# Altium PCB PCB1.PcbDoc (part 1 of 2)
Units mil, origin at the board's own origin, x right, y up, seen from the top; angles counter-clockwise.
Board outline 1707.5 x 1259.84 mil, 4 copper layers (Top Layer, GND, Sign, Bottom Layer), stack 41.556 mil thick; 63 components, 57 nets, 288 pads, 252 vias.
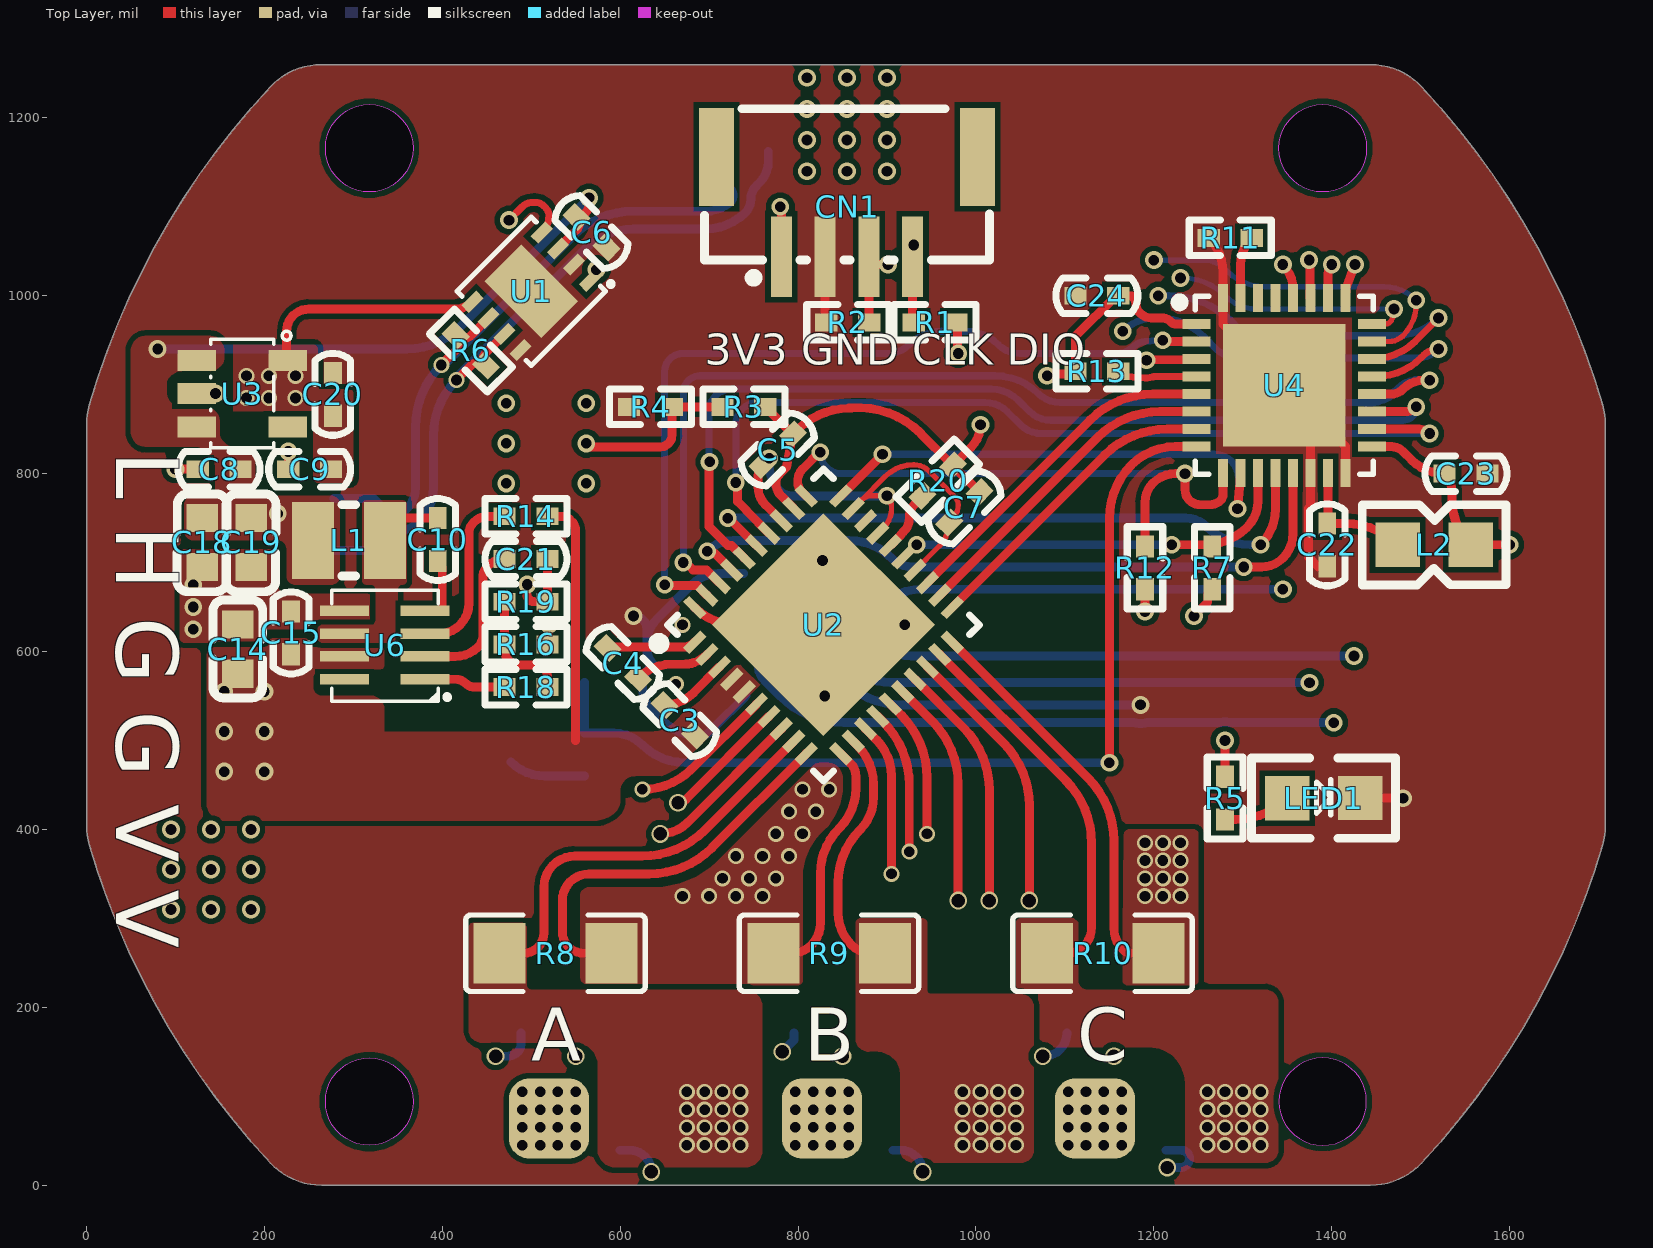
[diagram p0: Top Layer view]
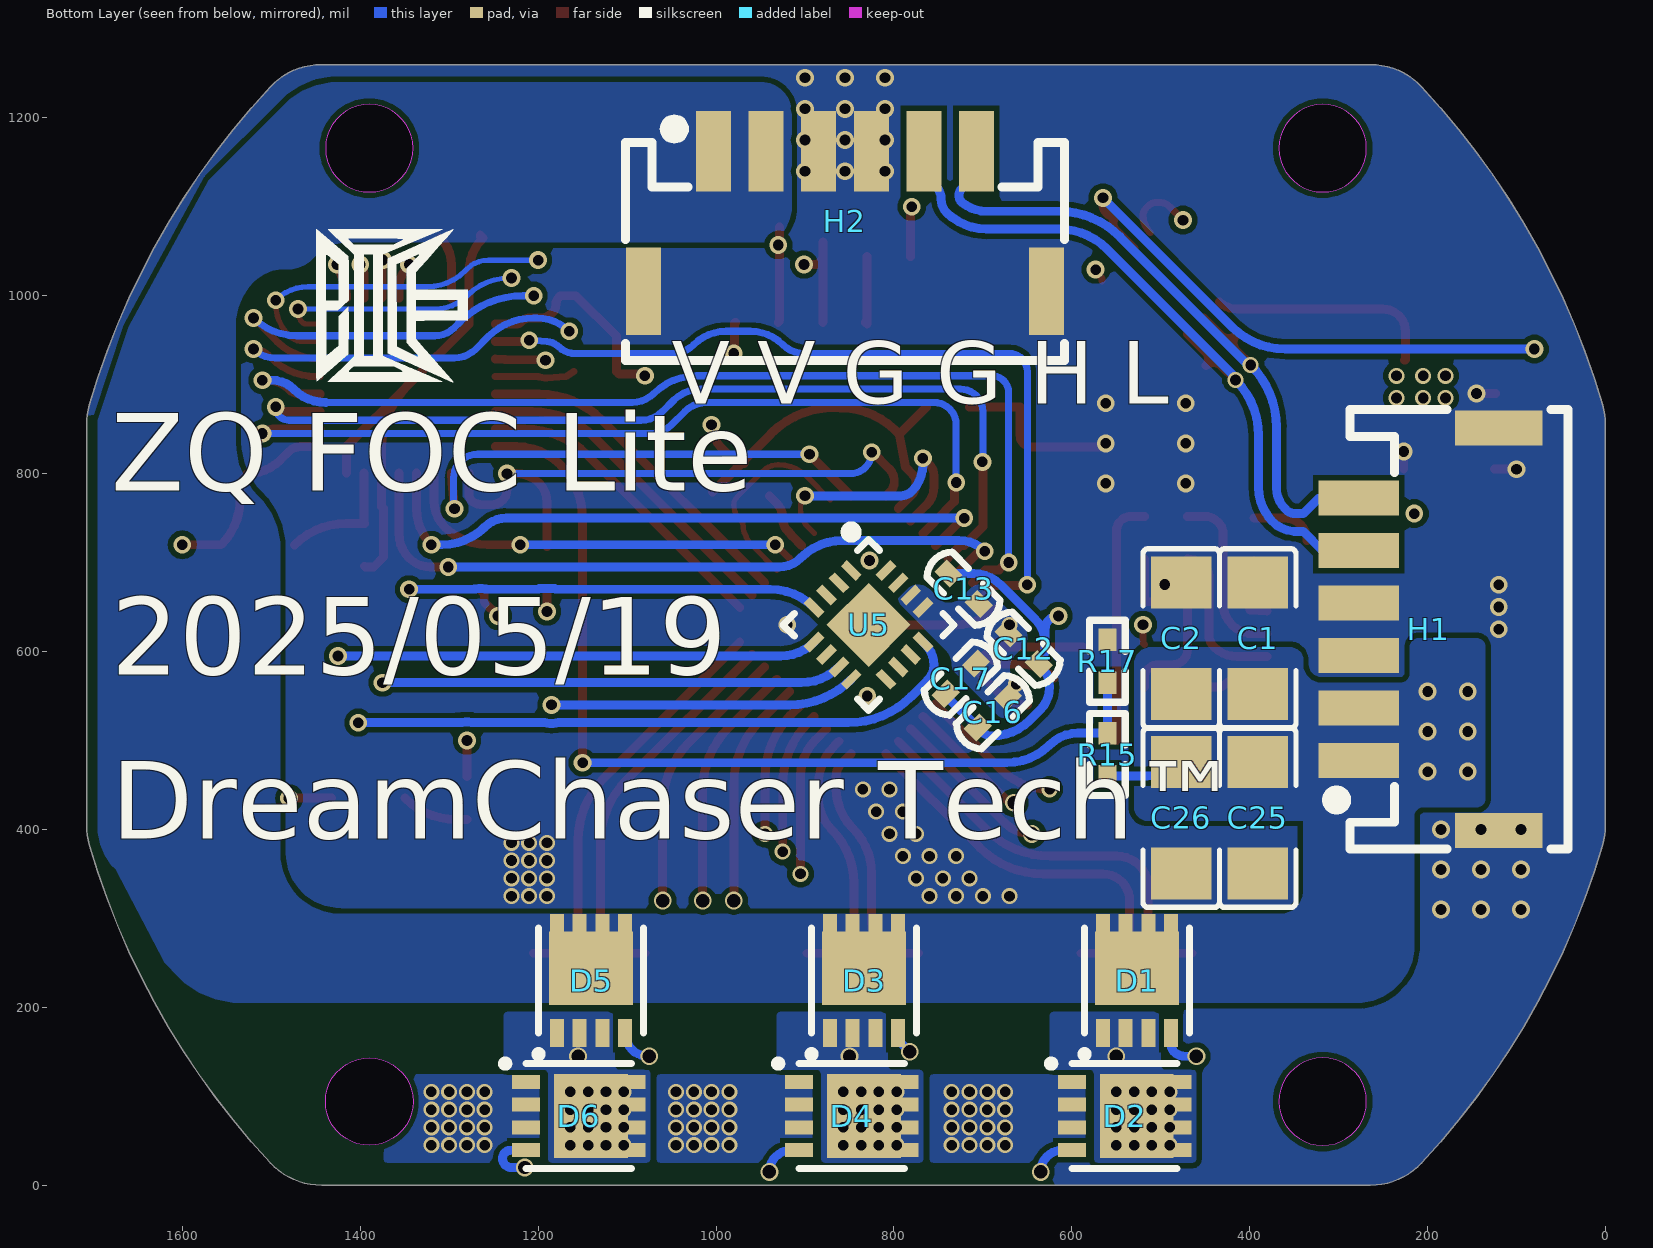
[diagram p1: Bottom Layer view, seen from below]
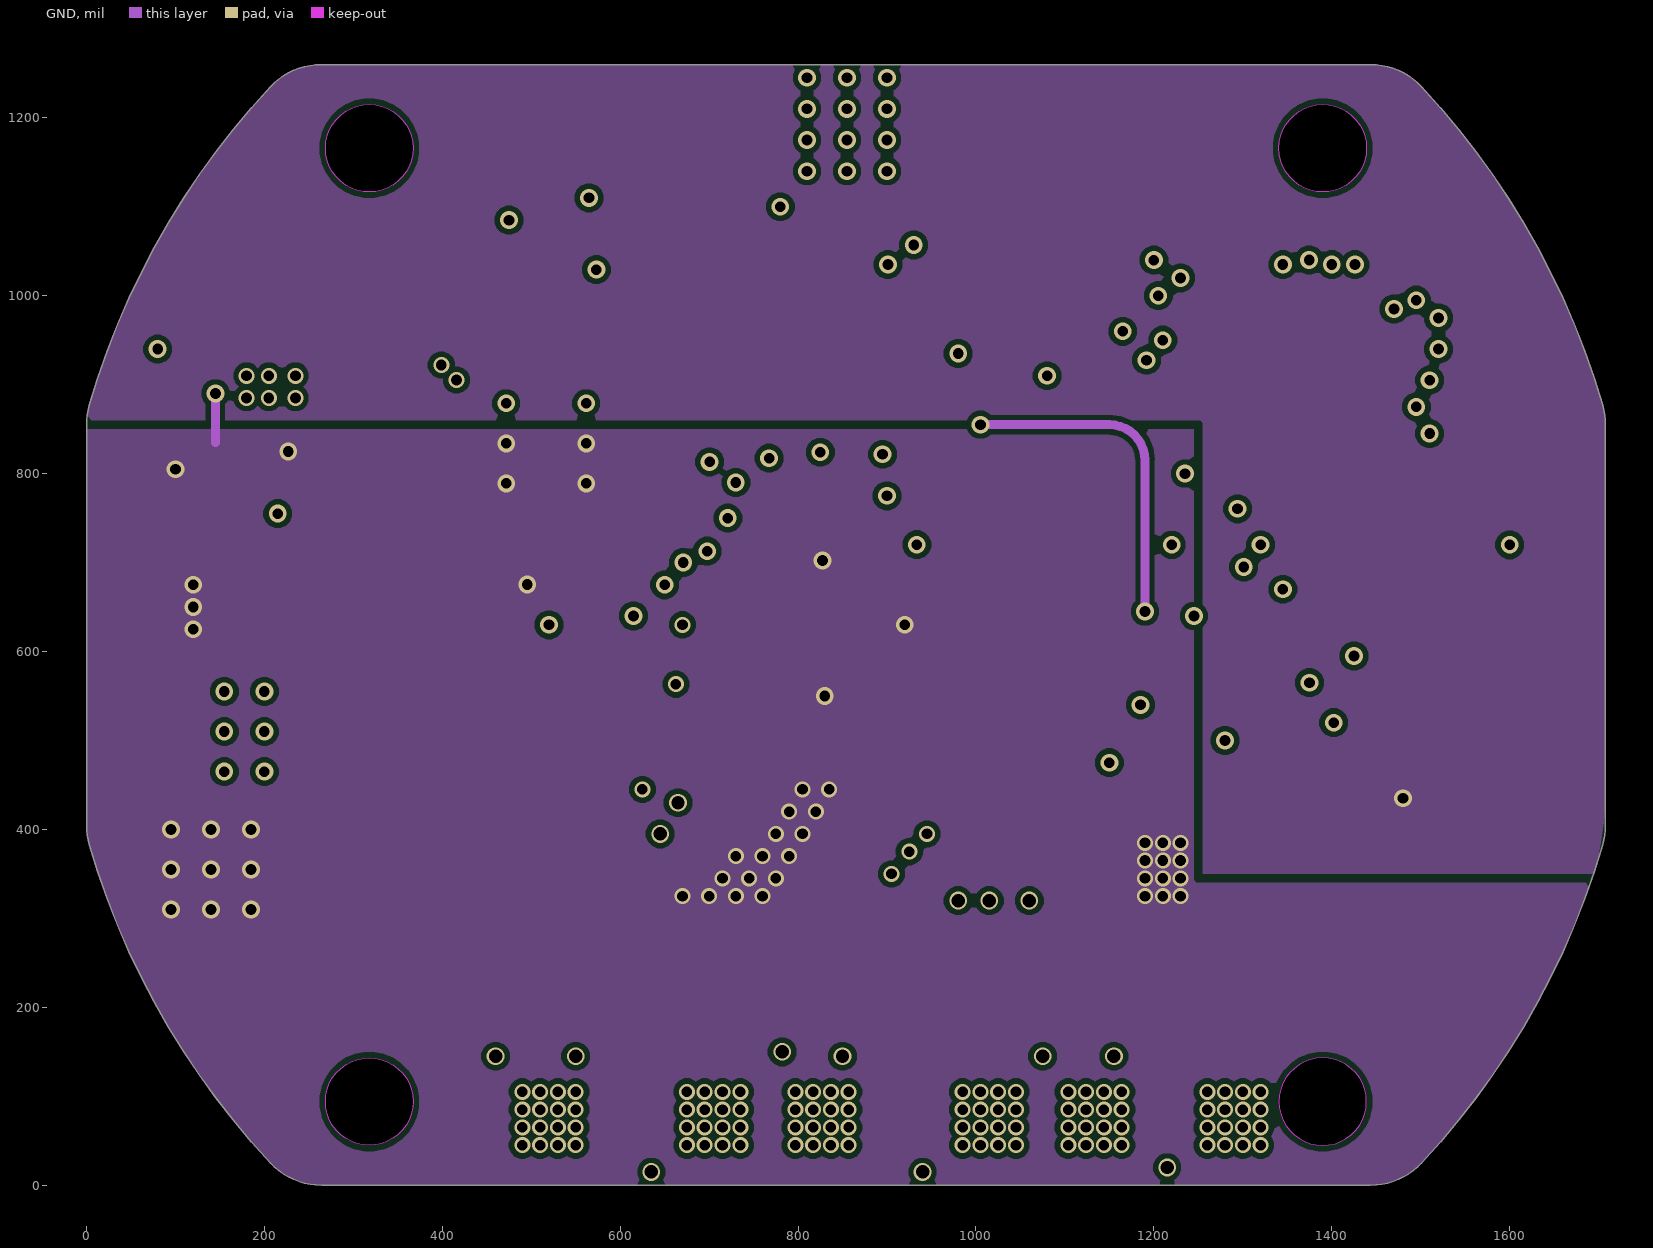
[diagram p2: GND]
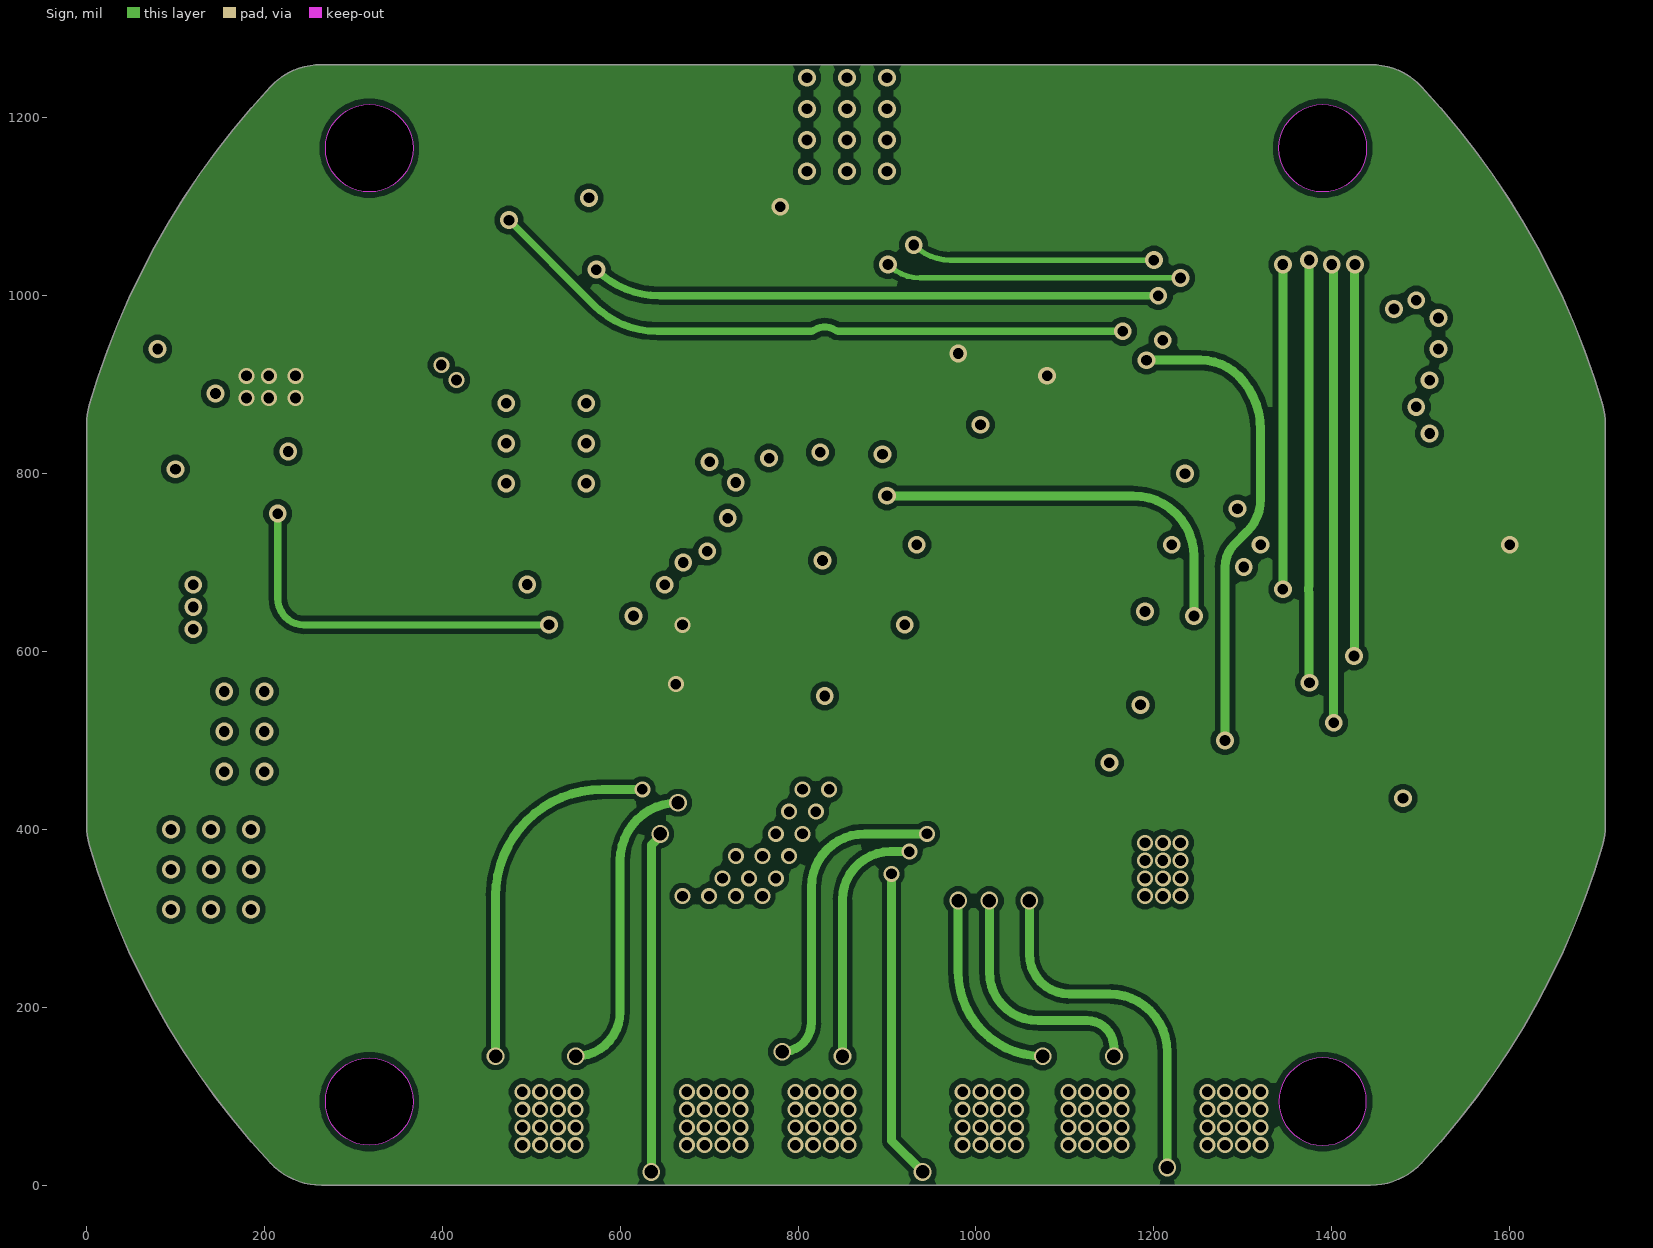
[diagram p3: Sign]
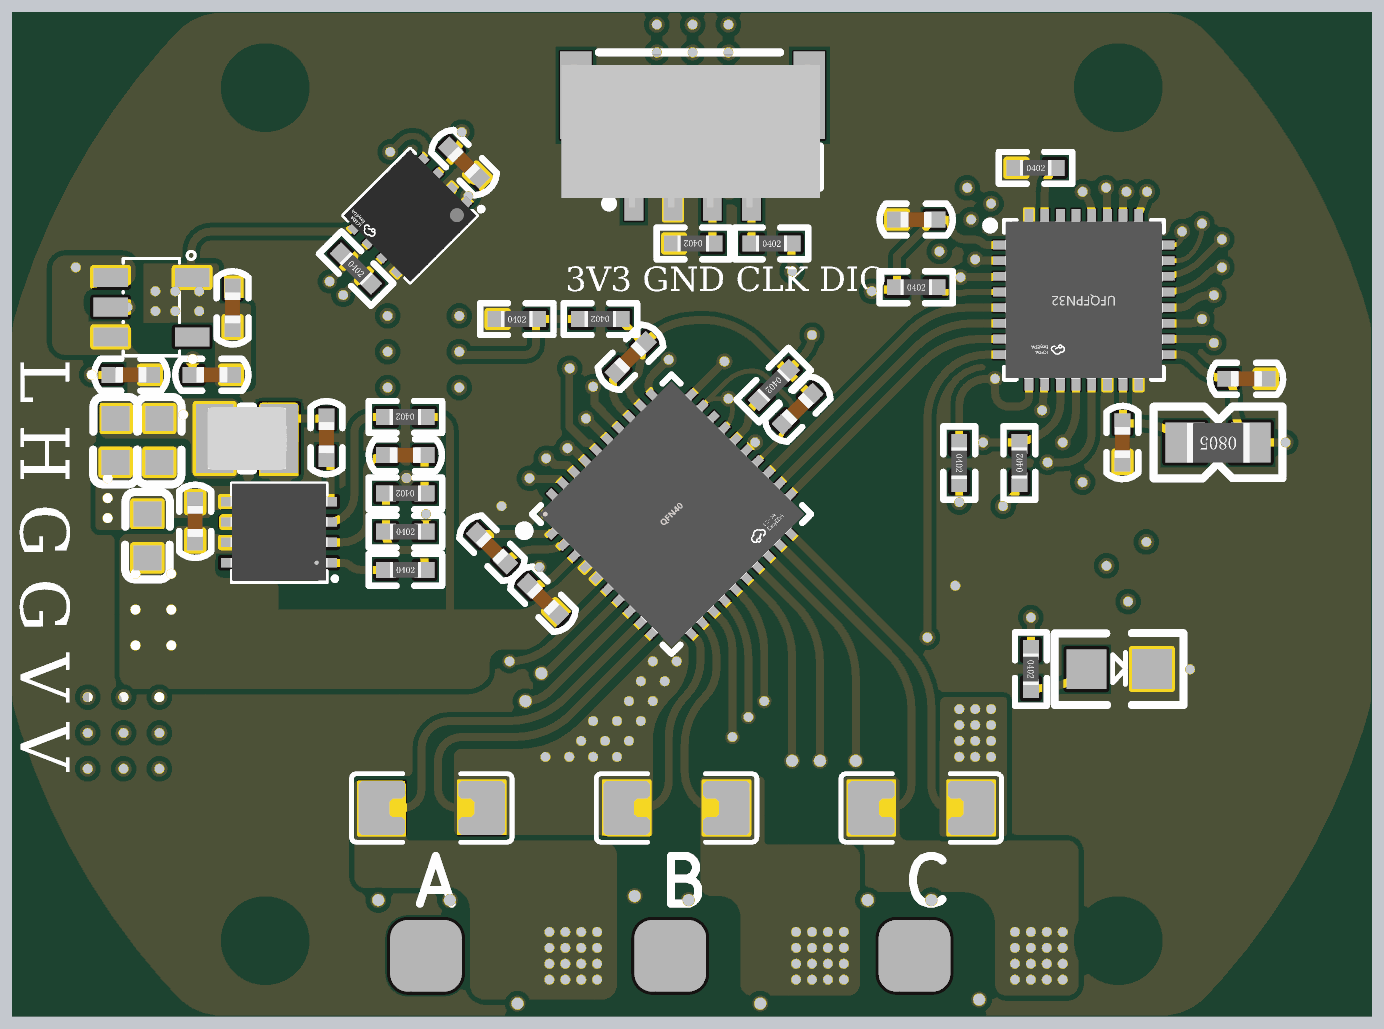
[diagram p5: 3D render of the assembled board from above, using the file's embedded part models]
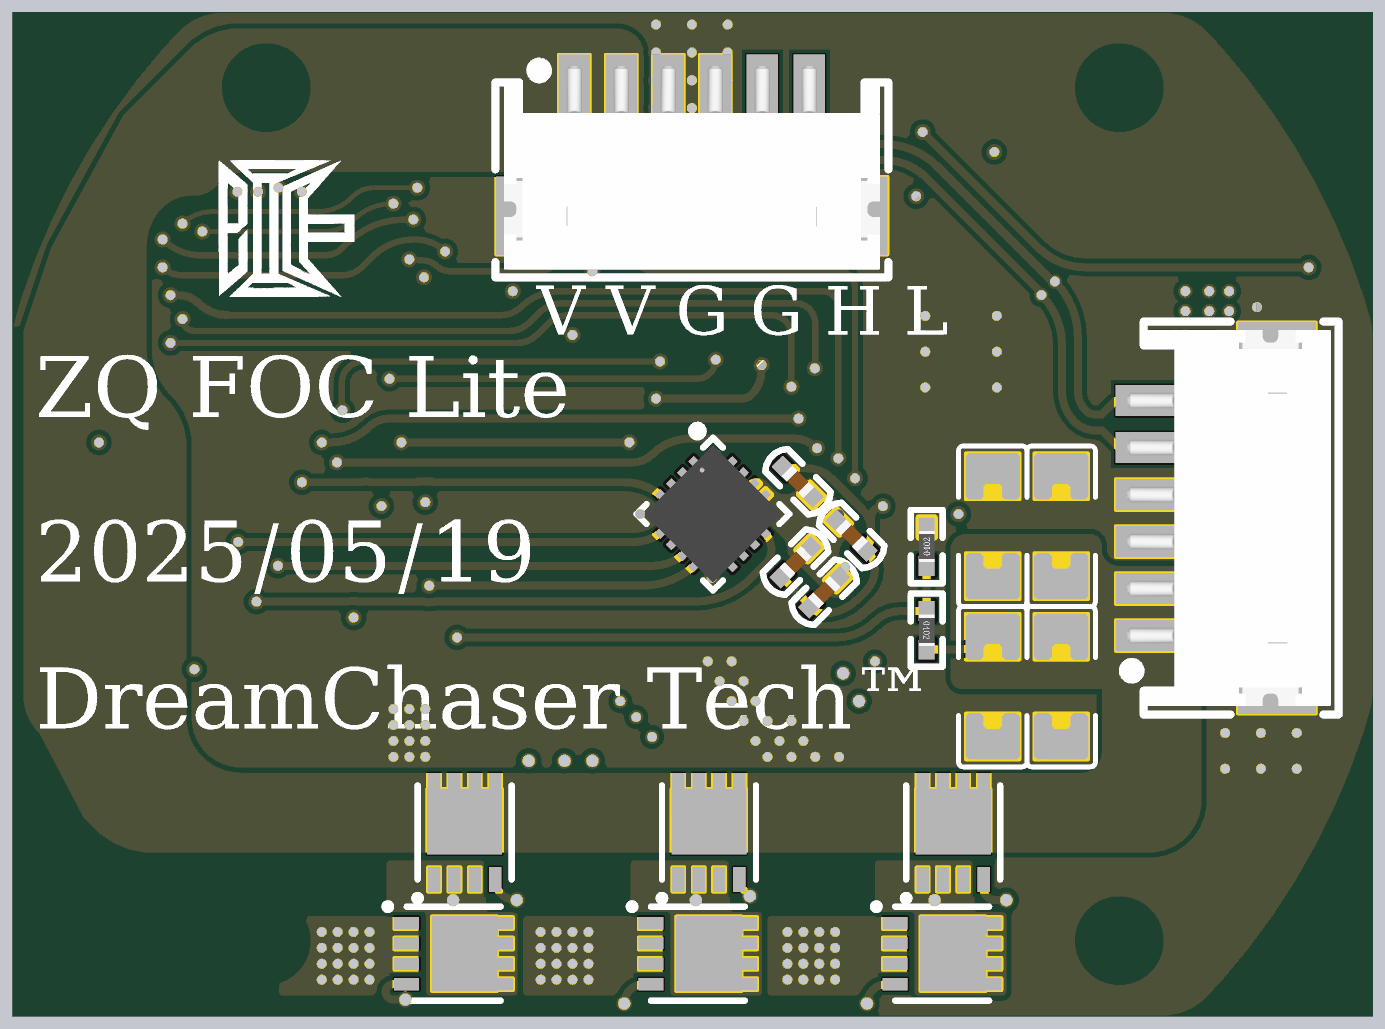
[diagram p6: 3D render of the assembled board from below, using the file's embedded part models]

## Layer stack, top to bottom
Top Solder: solder mask 0.4, Solder Resist, Dk 3.5
Top Layer: signal copper 1.4
Dielectric 2: prepreg 12, PP-006, Dk 4.1
GND: signal copper 1.378
Dielectric 1: dielectric 12, FR-4, Dk 4.8
Sign: signal copper 1.378
Dielectric 3: prepreg 12, PP-006, Dk 4.1
Bottom Layer: signal copper 1.4
Bottom Solder: solder mask 0.4, Solder Resist, Dk 3.5

## Board outline
206.79,24.97 cw(c853.88,629.92) 3.25,382.67 cw(c78.86,404.65) 0.12,404.65 0.13,855.2 cw(c78.87,855.2) 3.25,877.17 cw(c853.88,629.92) 206.79,1234.88 cw(c264.31,1181.1) 264.31,1259.84 1443.44,1259.84 cw(c1443.44,1181.1) 1500.96,1234.88 cw(c853.88,629.92) 1704.5,877.17 cw(c1628.89,855.2) 1707.62,855.2 1707.62,404.65 cw(c1628.89,404.65) 1704.5,382.67 cw(c853.88,629.92) 1500.96,24.97 cw(c1443.44,78.74) 1443.44,0 264.31,0 cw(c264.31,78.74)
cut-out: 1389.77,1116.61 cw(c1389.77,1165.82) 1340.56,1165.82 cw(c1389.77,1165.82) 1389.77,1215.03 cw(c1389.77,1165.82) 1438.99,1165.82 cw(c1389.77,1165.82)
cut-out: 1340.56,94.02 ccw(c1389.77,94.02) 1389.77,44.81 ccw(c1389.77,94.02) 1438.99,94.02 ccw(c1389.77,94.02) 1389.77,143.24 ccw(c1389.77,94.02)
cut-out: 317.98,1116.61 cw(c317.98,1165.82) 268.76,1165.82 cw(c317.98,1165.82) 317.98,1215.03 cw(c317.98,1165.82) 367.19,1165.82 cw(c317.98,1165.82)
cut-out: 317.98,44.81 cw(c317.98,94.02) 268.76,94.02 cw(c317.98,94.02) 317.98,143.24 cw(c317.98,94.02) 367.19,94.02 cw(c317.98,94.02)

## Design rules (kind name [scope] priority, off if disabled: settings)
Clearance [All] p1: gap=6 ignorepadtopadclearanceinfootprint=FALSE except(0: Arc-Hole Track-Hole SMDPad-Hole THPad-Hole Via-Hole Fill-Hole Poly-Hole Region-Hole Text-Hole)
DiffPairsRouting [All] p1: maxlimit=10 minlimit=10 mostfreqgap=10 toplayer_minwidth=8 toplayer_maxwidth=15 toplayer_prefwidth=10 midlayer1_minwidth=8 midlayer1_maxwidth=15 midlayer1_prefwidth=10 midlayer2_minwidth=8 midlayer2_maxwidth=15 midlayer2_prefwidth=10 bottomlayer_minwidth=8 bottomlayer_maxwidth=15 bottomlayer_prefwidth=10 maxuncoupledlength=500
HoleToHoleClearance [All] p1: gap=0 allowstackedmicrovias=TRUE
MinimumSolderMaskSliver [All] p1: minsoldermaskwidth=0
PlaneClearance [All] p1: clearance=6
PlaneConnect [All] p1: planeconnectstyle=Direct reliefexpansion=20 reliefentries=4 reliefconductorwidth=10 reliefairgap=10
PolygonConnect [All] p1: connectstyle=Direct reliefconductorwidth=10 reliefentries=4 polygonreliefangle="90 Angle" airgapwidth=10
RoutingVias [All] p1: holewidth=12 width=18 viastyle="Through Hole" minholewidth=12 minwidth=18 maxholewidth=28 maxwidth=50
SilkToSilkClearance [All] p1: silktosilkclearance=0
SilkToSolderMaskClearance [IsPad] p1: minsilkscreentomaskgap=0 clearancetoexposedcopper=TRUE
SolderMaskExpansion [All] p1: expansion=4 istentingtop=FALSE
SupplyNets "Schematic Supply Nets_6" [InNet('AGND')] p1: voltage=0.000
SupplyNets "Schematic Supply Nets_5" [InNet('PGND')] p2: voltage=0.000
SupplyNets "Schematic Supply Nets_4" [InNet('DGND')] p3: voltage=0.000
SupplyNets "Schematic Supply Nets_3" [InNet('VBUS')] p4: voltage=0.000
SupplyNets "Schematic Supply Nets_2" [InNet('DVDD')] p5: voltage=0.000
SupplyNets "Schematic Supply Nets_1" [InNet('3V3')] p6: voltage=0.000
SupplyNets "Schematic Supply Nets" [InNet('5V')] p7: voltage=0.000
Width [All] p1: maxlimit=20 minlimit=6 preferedwidth=10
23 further rules are at their usual default settings.

## Classes and differential pairs
differential pair CAN: +CAN_P -CAN_N

## Components (designator, comment, footprint, x,y, rotation, side; value= is the part's Value field where it differs from the comment)
C1 "100uF" 1206 374.02,1205.63 r270 bottom
C2 "100uF" 1206 460.02,1205.63 r270 bottom
C3 "1uF" c0402 650,540 r315 top
C4 "47nF" c0402 585.92,604.08 r315 top
C5 "1uF" c0402 794.08,844.08 r225 top
C6 "0.1uF" c0402 584.85,1054.5 r135 top
C7 "0.1uF" c0402 1004.08,779.08 r225 top
C8 "10uF" c0402 125,805 r0 top
C9 "10uF" c0402 226.8,805 r0 top
C10 "100nF" c0402 395,701.8 r90 top
C12 "1uF" C0402 671.26,620.19 r225 bottom
C13 "100nF" C0402 704.68,653.61 r45 bottom
C14 "10uF" C0603 82.05,1217.9 r270 top
C15 "100nF" c0402 230,645 r270 top
C16 "1uF" C0402 705.76,514.69 r135 bottom
C17 "100nF" C0402 741.75,552.52 r135 bottom
C18 "10uF" C0603 217.95,107.22 r90 top
C19 "10uF" C0603 272.95,107.22 r90 top
C20 "0.1uF" c0402 277,865 r90 top
C21 "100nF" c0402 518.2,704 r180 top
C22 "0.1uF" c0402 1395,695.8 r90 top
C23 "0.1uF" c0402 1575,800 r180 top
C24 "0.1uF" c0402 1160,1000 r180 top
C25 "100uF" 1206 407.98,-177.63 r90 bottom
C26 "100uF" 1206 493.98,-177.63 r90 bottom
CN1 "卧式STLINK" CONN-SMD_4P-P1.25_GH1.25-4P 855,1100 r180 top
D1 "NTMFS5C410NL" DFN-8_L3.0-W3.0-P0.65-BL 526.73,230 r180 bottom
D2 "NTMFS5C410NL" DFN-8_L3.0-W3.0-P0.65-BL 540.55,77.72 r270 bottom
D3 "NTMFS5C410NL" DFN-8_L3.0-W3.0-P0.65-BL 833.62,230 r180 bottom
D4 "NTMFS5C410NL" DFN-8_L3.0-W3.0-P0.65-BL 847.44,77.72 r270 bottom
D5 "NTMFS5C410NL" DFN-8_L3.0-W3.0-P0.65-BL 1140.51,230 r180 bottom
D6 "NTMFS5C410NL" DFN-8_L3.0-W3.0-P0.65-BL 1154.33,77.72 r270 bottom
H1 "卧式XH1.5 6PIN" CONN-SMD_6P-P1.50_ZX-ZH1.5-6PWT 180,625 r90 bottom
H2 "卧式XH1.5 6PIN" CONN-SMD_6P-P1.50_ZX-ZH1.5-6PWT 855,1065 r180 bottom
L1 "22uH" IND-SMD_L2.5-W2.0 295,725 r0 top value=10uH
L2 "10μH" L0805 1556.2,720 r180 top
LED1 "LED" led0805 1349.75,435.12 r0 top
R1 "10KΩ" R0402 930,970 r0 top
R2 "10KΩ" R0402 880,970 r180 top
R3 "0Ω" R0402 763.2,875 r180 top
R4 "0Ω" R0402 610,875 r0 top
R5 "2KΩ" R0402 1280,459.32 r270 top
R6 "120Ω" R0402 415.15,955.5 r315 top
R7 "10KΩ" R0402 1265.56,670 r90 top
R8 "30mR" 1206 1118.23,243.81 r180 top
R9 "30mR" 1206 243.87,277.78 r0 top
R10 "30mR" 1206 1733.23,243.81 r180 top
R11 "10KΩ" R0402 1261.8,1065 r0 top
R12 "200KΩ" R0402 1190,718.2 r270 top
R13 "10KΩ" R0402 1111.8,915 r0 top
R14 "10KΩ" R0402 518.2,752 r180 top
R15 "10KΩ" R0402 560,508.2 r270 bottom
R16 "43KΩ" R0402 470,608 r0 top
R17 "1KΩ" R0402 560,565 r90 bottom
R18 "51KΩ" R0402 470,560 r0 top
R19 "8.2KΩ" R0402 518.2,656 r180 top
R20 "0Ω" R0402 974.08,809.08 r225 top
U1 "SIT1057QTK/3" DFN-8_L3.0-W3.0-P0.65-BL-EP 503.14,1007.61 r135 top
U2 "DRV8323HRTAR" QFN-40_L6.0-W6.0-P0.50-BL-EP4.5 828.5,630 r315 top
U3 "XC6201P332MR-HXY" SOT-23-5_L3.0-W1.7-P0.95-LS2.8-BR 175,890 r180 top
U4 "STM32G431KBU3" UFQFPN-32_L5.0-W5.0-P0.50-BL-EP3.5 1346.58,899.21 r270 top
U5 "MA600" qfn-16-l3.0-w3.0-p0.50-tl-ep1.7 828.48,630 r225 bottom
U6 "MP9943" "QFN-8 3x3" 380.55,568.82 r180 top

## Footprints (in the part's own frame and the unit in brackets; to place one, negate y for a bottom-side part, rotate by r counter-clockwise, add the part's x,y. Pads: shape width x height; smd on the part's side, far side on the other; paste and mask are expansions set on the pad)
1206 [mm]
  rect 1.485x1.728 smd paste-100 mask+0.051: 1(13.417,-0.431) 2(16.602,-0.431)
  silkscreen extent 12.45,-1.52 17.57,0.66, body extent 13.41,-1.24 16.61,0.38, height 1.11
c0402 [mil]
  rect 25x20 smd: 1(0,0) 2(48.2,0)
  silkscreen extent -22,-20 70,20, body extent 5,-10 44,10, height 20
C0402 [mil]
  rect 25x20 smd: 1(0,0) 2(48.2,0)
  silkscreen extent -22,-20 70,20, body extent 5,-10 44,10, height 20
C0603 [mm]
  rect 0.8x0.9 smd: 1(14.93,2.234) 2(16.33,2.234)
  silkscreen extent 14.22,1.52 17.02,2.95, body extent 14.82,1.84 16.42,2.64, height 0.78
CONN-SMD_4P-P1.25_GH1.25-4P [mm]
  rect 0.6x2.3 smd mask+0.051: 1(1.875,1.425) 2(0.625,1.425) 3(-0.625,1.425) 4(-1.875,1.425)
  rect 1x2.8 smd mask+0.051: 5(-3.725,-1.425) 6(3.725,-1.425)
  silkscreen extent -4.06,-2.8 4.06,2.16, body extent -4.07,-2.4 4.19,2.15, height 4.13
CONN-SMD_6P-P1.50_ZX-ZH1.5-6PWT [mm]
  rect 1x2.3 smd paste+0 mask+0.05: 1(-3.75,2.473) 2(-2.25,2.473) 3(-0.75,2.473) 4(0.75,2.473) 5(2.25,2.473) 6(3.75,2.473)
  rect 1x2.5 smd paste+0 mask+0.05: 7(5.75,-1.527) 8(-5.75,-1.527)
  silkscreen extent -6.27,-3.5 6.27,3.52, body extent -6,-3.25 6.01,3.25, height 3.78
DFN-8_L3.0-W3.0-P0.65-BL [mm]
  rect 0.4x0.8 smd paste-100 mask+0.051: D(-0.975,1.5) D(-0.325,1.5) D(0.325,1.5) D(0.975,1.5) G(0.975,-1.5) S(-0.975,-1.5) S(-0.325,-1.5) S(0.325,-1.5)
  rect 2.4x2.1 smd paste-100 mask+0.051: D(0,0.35)
  silkscreen extent -1.6,-2.2 1.5,1.5, body extent -1.55,-1.6 1.55,1.6, height 0.8
DFN-8_L3.0-W3.0-P0.65-BL-EP [mm]
  rect 0.3x0.6 smd paste+0 mask+0.05: 1(-0.966,-1.297) 2(-0.316,-1.297) 3(0.334,-1.297) 4(0.984,-1.297) 5(0.984,1.503) 6(0.334,1.503) 7(-0.316,1.503) 8(-0.966,1.503)
  rect 2.3x1.5 smd paste+0 mask+0.05: 9(0.009,0.103)
  silkscreen extent -1.5,-1.7 1.51,1.6, body extent -1.49,-1.4 1.51,1.6, height 1.01
IND-SMD_L2.5-W2.0 [mm]
  rect 1.2x2.2 smd: 1(1.028,0) 2(-1.028,0)
  silkscreen extent -0.2,-1.02 0.2,1.02, body extent -1.26,-1 1.26,1, height 1.2
L0805 [mil]
  rect 50x50 smd: 1(0,0) 2(82.3,0.2)
  silkscreen extent -40,-45 122,45, body extent 1,-24 80,25, height 22
led0805 [mil] "1/8W"
  rect 50x50 smd: 1(0,0) 2(82.3,0.2)
  silkscreen extent -40,-45 122,45, body extent 2,-25 80,25, height 20
"QFN-8 3x3" [mm]
  rect 1.4x0.3 smd: 1(0,0) 2(0,-0.65) 3(0,-1.3) 4(0,-1.95) 5(2.3,-1.95) 6(2.3,-1.3) 7(2.3,-0.65) 8(2.3,0)
  silkscreen extent -0.64,-2.54 2.67,0.64, body extent -0.41,-2.53 2.69,0.57, height 0.94
qfn-16-l3.0-w3.0-p0.50-tl-ep1.7 [mm]
  rect 0.6x0.25 smd: 1(-1.45,0.75) 2(-1.45,0.25) 3(-1.45,-0.25) 4(-1.45,-0.75) 9(1.45,-0.75) 10(1.45,-0.25) 11(1.45,0.25) 12(1.45,0.75)
  rect 0.25x0.6 smd: 5(-0.75,-1.45) 6(-0.25,-1.45) 7(0.25,-1.45) 8(0.75,-1.45) 13(0.75,1.45) 14(0.25,1.45) 15(-0.25,1.45) 16(-0.75,1.45)
  rect 1.7x1.7 smd: 17(0,0)
  silkscreen extent -2.38,-1.72 1.72,1.72, body extent -1.55,-1.55 1.55,1.55, height 0.94
QFN-40_L6.0-W6.0-P0.50-BL-EP4.5 [mm]
  rect 0.25x0.7 smd paste-100 mask+0.051: 1(-2.25,-2.95) 2(-1.75,-2.95) 3(-1.25,-2.95) 4(-0.75,-2.95) 5(-0.25,-2.95) 6(0.25,-2.95) 7(0.75,-2.95) 8(1.25,-2.95) 9(1.75,-2.95) 10(2.25,-2.95) 21(2.25,2.95) 22(1.75,2.95) 23(1.25,2.95) 24(0.75,2.95) 25(0.25,2.95) 26(-0.25,2.95) 27(-0.75,2.95) 28(-1.25,2.95) 29(-1.75,2.95) 30(-2.25,2.95)
  rect 0.7x0.25 smd paste-100 mask+0.051: 11(2.95,-2.25) 12(2.95,-1.75) 13(2.95,-1.25) 14(2.95,-0.75) 15(2.95,-0.25) 16(2.95,0.25) 17(2.95,0.75) 18(2.95,1.25) 19(2.95,1.75) 20(2.95,2.25) 31(-2.95,2.25) 32(-2.95,1.75) 33(-2.95,1.25) 34(-2.95,0.75) 35(-2.95,0.25) 36(-2.95,-0.25) 37(-2.95,-0.75) 38(-2.95,-1.25) 39(-2.95,-1.75) 40(-2.95,-2.25)
  rect 4.5x4.5 smd paste-100 mask+0.051: 41(0,0)
  silkscreen extent -3.15,-3.85 3.15,3.15, body extent -3.01,-3.01 3.01,3.01, height 0.83
R0402 [mil] "1/16W"
  rect 25x20 smd: 1(0,0) 2(48.2,0)
  silkscreen extent -22,-20 70,20, body extent 5,-10 44,10, height 14
SOT-23-5_L3.0-W1.7-P0.95-LS2.8-BR [mm]
  rect 1.1x0.6 smd: 1(1.3,-0.95) 2(1.3,0) 3(1.3,0.95) 4(-1.3,0.95) 5(-1.3,-0.95)
  silkscreen extent -1.4,-1.78 0.9,1.55, body extent -1.5,-1.5 1.5,1.5, height 1.3
UFQFPN-32_L5.0-W5.0-P0.50-BL-EP3.5 [mm]
  rect 0.28x0.8 smd paste-100 mask+0.051: 1(-1.75,-2.5) 2(-1.25,-2.5) 3(-0.75,-2.5) 4(-0.25,-2.5) 5(0.25,-2.5) 6(0.75,-2.5) 7(1.25,-2.5) 8(1.75,-2.5) 17(1.75,2.5) 18(1.25,2.5) 19(0.75,2.5) 20(0.25,2.5) 21(-0.25,2.5) 22(-0.75,2.5) 23(-1.25,2.5) 24(-1.75,2.5)
  rect 0.8x0.28 smd paste-100 mask+0.051: 9(2.5,-1.75) 10(2.5,-1.25) 11(2.5,-0.75) 12(2.5,-0.25) 13(2.5,0.25) 14(2.5,0.75) 15(2.5,1.25) 16(2.5,1.75) 25(-2.5,1.75) 26(-2.5,1.25) 27(-2.5,0.75) 28(-2.5,0.25) 29(-2.5,-0.25) 30(-2.5,-0.75) 31(-2.5,-1.25) 32(-2.5,-1.75)
  rect 3.5x3.5 smd paste-100 mask+0.051: 33(0,0)
  silkscreen extent -2.54,-3.12 2.54,2.54, body extent -2.51,-2.52 2.52,2.51, height 0.61

## Part data
C1 C2 C14 C18 C19 C25 C26: library part 1210贴片电容, "1210贴片电容"
C3 C4 C5 C6 C7 C8 C9 C10 C12 C13 C15 C16 C17 C20 C21 C22 C23 C24: library part 0402贴片电容, "贴片电容0402"
D1 D2 D3 D4 D5 D6: "N沟道MOS管", ComponentLink1Description="Manufacturer Link", ComponentLink1URL=http://www.irf.com/, DatasheetVersion=PD-9.814, LatestRevisionDate=17-Jul-2002, LatestRevisionNote="Re-released for DXP Platform.", Note="Pin 2 is electrically connected to pin 4.", PackageDescription="TO, Thru-Hole, Vertical, Heatsink Mounted; 3 In-Line Leads; Pitch 2.54 mm", PackageReference=TO-220AB, PackageVersion=Feb-1997, Published=8-Jun-2000, Publisher="Altium Limited"
L1: library part 0530屏蔽电感, "一体成型屏蔽电感，0530封装，额定电流3A", DC Resistance (DCR)=125mΩ, JLCPCB Part Class="Extended Part", LCSC Part Name="10uH ±20% 3.5A", Manufacturer=XR(祥如), Manufacturer Part=XR0530-100M, Rated Current=3.2A, Saturation Current (Isat)=3.5A, Tolerance=±20%, Add into BOM=yes, Convert to PCB=yes, Datasheet=https://atta.szlcsc.com/upload/public/pdf/source/20240328/42FE63A3232C4AF7EB8F1CDEDD5FC69F.pdf, Device=XR0530-100M, Supplier=LCSC, Supplier Footprint=SMD,0530, Supplier Part=C5307602, Symbol=XR0530-100M, Type=一体成型电感
L2: library part 0805贴片电感, "0805贴片电感"
LED1: library part 0805贴片LED, "0805贴片LED"
R1 R2 R3 R4 R5 R6 R7 R11 R12 R13 R14 R15 R16 R17 R18 R19 R20: library part 0402贴片电阻, "0402贴片电阻"
R8 R9 R10: library part 2512检流电阻, "2512检流电阻"
U2: JLCPCB Part Class="Extended Part", LCSC Part Name="5mA 无刷直流BLDC电机驱动芯片 60V", Manufacturer=TI(德州仪器), Add into BOM=yes, Convert to PCB=yes, Datasheet=https://www.ti.com/cn/lit/gpn/drv8323, Device=DRV8323HRTAR, Manufacturer Part=DRV8323HRTAR, Supplier=LCSC, Supplier Footprint=QFN-40-EP(6x6), Supplier Part=C701783, Symbol=DRV8323HRTAR
U3: "3.3V LDO", JLCPCB Part Class="Extended Part", Manufacturer="HXY MOSFET(华轩阳电子)", MAX Output Current=300mA, Maximum Input Voltage=12V, Output Voltage=3.3V, Add into BOM=yes, Convert to PCB=yes, Datasheet=https://atta.szlcsc.com/upload/public/pdf/source/20231208/3D7EFECB06481ED5AED4680614D7FFF5.pdf, Device=XC6201P332MR-HXY, LCSC Part Name=XC6201P332MR-HXY, Manufacturer Part=XC6201P332MR-HXY, Output Polarity=正极, Output Type=固定, Supplier=LCSC, Supplier Footprint=SOT-23-5L, Supplier Part=C19626990, Symbol=XC6201P332MR-HXY
U4: JLCPCB Part Class="Extended Part", LCSC Part Name="带DSP和FPU的170MHz主流ARM Cortex-M4 MCU，具有128 KB Flash存储器、数学加速器和中等模拟电平集成", Low Voltage Detection Threshold=1.71V~3.6V, Manufacturer=ST(意法半导体), ADC (Bit)=12bit, Add into BOM=yes, Application Area=-, Convert to PCB=yes, CPU Core=ARM-M4, CPU Maximum Speed=170MHz, DAC (Bit)=12bit, Datasheet=https://atta.szlcsc.com/upload/public/pdf/source/20210607/F3CD0646E5D00AAFDE875C196C2D7333.pdf, Device=STM32G431KBU3, Manufacturer Part=STM32G431KBU3, Number of I/O=26, Program Memory Type=FLASH, Program Storage Size=128KB, Supplier=LCSC, Supplier Footprint=UFQFPN-32(5x5), Supplier Part=C1341901, Symbol=STM32G431KBU3
U5: "磁编码器"

## Free pads (board coordinates)
  rrect50% 90x90 smd: 2(520,75) 2(826.89,75) 2(1133.78,75)

## Via types
v1: diameter 18, hole 12, Top Layer to Bottom Layer, tented both sides, 138 vias
v2: diameter 20, hole 12, Top Layer to Bottom Layer, tented both sides, 100 vias
v3: diameter 20, hole 15, Top Layer to Bottom Layer, tented both sides, 14 vias

## Nets (pads, with @x,y where several pads share a name; then routed paths per layer and width w, separated by ;. In a path a pad name is that pad's centre, name@x,y a point inside that pad or via, vN(x,y) a via of type N, cw(c..) or ccw(c..) an arc to the next point about the centre after c; other vN are vias at no path point)
3V3: C9.2 C12.1 C13.1 C16.2 C17.2 C20.1 C23.2 C24.1 CN1.1 L2.1 R1.2 R13.1 U1.5 U3.5 U4.1 U4.17 U5.13 U5.14 | length 818.4
  Top Layer w10: U3.5@226.18,927.4 cw(c226.18,928.58) 225,928.58 225,960 cw(c250,960) 250,985 414.16,985 ccw(c414.16,1012.89) U1.5@433.88,993.17 ; v2(780,1100) 781.18,1098.82 CN1.1@781.18,1043.9 ; R1.2@978.2,970 979.1,969.1 979.1,935.9 v2(980,935) ; v2(1080,910) 1081.91,911.91 1108.71,911.91 R13.1@1111.8,915 1111.8,954.3 1157.5,1000 C24.1@1160,1000 1172.93,1000 cw(c1172.93,995) 1176.46,998.54 cw(c1167.93,990) 1180,990 ccw(c1192.07,990) 1183.54,981.46 1185,980 ; 1185,980 ccw(c1197.07,992.07) 1197.07,975 1207.93,975 cw(c1207.93,957.93) 1220,970 ccw(c1224.54,974.54) 1224.54,968.12 U4.1@1248.15,968.12 ; U4.17@1445,830.32 1467.16,830.32 cw(c1467.16,812.16) 1480,825 ; 1480,825 1489.59,815.41 ccw(c1526.8,852.63) C23.2@1526.8,800 cw(c1507,780.2) 1535,780.2 1535,771.18 ccw(c1607.38,771.18) 1556.2,720 v2(1600,720)
  other v1: 662.59,563.3 670,630 180,885 205,885 235,885 180,910 205,910 235,910
5V: C6.2 C8.2 C18.2 C19.2 L1.2 R16.2 U1.3 U3.1 U3.3 | length 1067.2
  Top Layer w8: R16.2@518.2,608 520,609.8 v2(520,630)
  Top Layer w10: U1.3@529.93,1053.02 550.77,1073.87 ccw(c543.41,1081.22) C6.2@550.77,1088.58 ccw(c550.77,1102.81) 565,1102.81 v2(565,1110)
  Sign w8: v2(215,755) 215,659.96 ccw(c245.61,660) 223.98,638.34 ccw(c244.14,658.54) 244.14,630 v2(520,630)
  Bottom Layer w10: v2(80,940) 360,940 ccw(c360,1024.5) 419.75,964.75 v2(565,1110)
AGND: C5.1 C7.1 R3.1 R12.2 R20.1 U2.32 | length 853
  Top Layer w10: R3.1@763.2,875 794.07,844.13 794.07,844 792.32,835.24 786.91,807.21 778.47,798.47 ccw(c787.07,790) 775,790 ccw(c796.86,790) 781.4,774.54 U2.32@795.1,760.84 ; C5.1@794.21,843.97 cw(c858.63,788.64) 857.09,873.55 859.84,873.77 cw(c867.99,774.97) 938.05,845.12 938.14,845.03 970.26,812.9 R20.1@974.08,809.08 ; C7.1@1004.08,779.08 R20.1@974.08,809.08 ; v2(1005,855) cw(c968.79,855) 994.39,829.39 R20.1@974.08,809.08 ; v2(1190,645) R12.2@1190,670
  GND w10: v2(1005,855) 1150,855 cw(c1150,815) 1190,815 v2(1190,645)
AGND': R20.2 U2.26 | length 68.9
  Top Layer w10: U2.26@903.67,719.08 914.59,730 ccw(c907.54,737.09) 915.66,731.26 916.46,732.37 cw(c933.52,720.12) 919.92,736.12 ccw(c913.39,743.7) 922.15,738.87 ccw(c901.85,750) 925,750 cw(c949.14,750) 932.07,767.07 R20.2@940,775
CAN_N: H1.6 H2.6 R6.1 U1.6 | length 829.3
  Top Layer w10: v1(398.95,922.2) 415.15,938.39 ; U1.6@451.98,975.07 432.41,955.5 cw(c423.78,964.13) R6.1@415.15,955.5 ; 415.15,938.39 ccw(c406.59,946.95) R6.1@415.15,955.5 ; 415.15,938.39 ccw(c406.59,946.95) R6.1@415.15,955.5
  Bottom Layer w10: H1.6@278.02,771.98 317.64,771.98 323.02,771.98 340,755 347.93,755 ccw(c347.93,772.07) 360,760 ; 360,760 ccw(c335.86,784.14) 370,784.14 370,852.3 cw(c468.86,852.3) v1(398.95,922.2) ccw(c398.95,929.03) 403.78,924.2 546.01,1066.43 cw(c615,997.43) 615,1095 696.15,1095 ccw(c696.15,1137.97) 723.18,1104.57 ccw(c716.86,1112.32) 726.58,1109.98 ccw(c715.67,1112.59) 726.89,1112.59 ccw(c715.67,1112.59) H2.6@723.61,1120.52 ; H2.6@707.36,1162.36 707.36,1150.58 ccw(c740.7,1150.58) 717.13,1127.01 H2.6@723.6,1120.53
CAN_P: H1.5 H2.5 R6.2 U1.7 | length 876.5
  Top Layer w10: v1(415.93,905.23) 432.12,921.42 ; U1.7@470.07,956.98 449.23,936.13 ; 432.12,921.42 cw(c440.67,912.86) R6.2@449.21,921.44 ; 432.12,921.42 cw(c440.67,912.86) R6.2@449.21,921.44 ; R6.2@449.21,921.44 cw(c456.59,928.78) 449.23,936.13 ; R6.2@449.21,921.44 cw(c456.59,928.78) 449.23,936.13
  Bottom Layer w10: H1.5@277.36,713.58 318.58,713.58 340,735 347.93,735 ccw(c347.93,772.07) 351.5,735.17 ccw(c347.93,772.07) 374.14,745.86 ccw(c335.86,784.14) 390,784.14 390,842.64 cw(c478.51,842.64) 415.93,905.23 cw(c422.75,905.23) 417.93,910.06 560.15,1052.28 cw(c615,997.43) 615,1075 696.15,1075 ccw(c696.15,1137.97) 740.67,1093.44 ccw(c725.67,1108.45) 746.89,1108.45 cw(c768.12,1108.45) 753.11,1123.46 756.66,1127.01 ccw(c733.08,1150.58) 766.42,1150.58 H2.5@766.42,1162.36
DGND: C6.1 C12.2 C13.2 C16.1 C17.1 C20.2 C22.1 C23.1 C24.2 CN1.2 LED1.2 R2.2 R4.1 R11.1 U1.2 U1.8 U1.9 U4.14 U4.16 U4.32 U4.33 U5.8 | length 1432.7
  Top Layer w10: R2.2@830,968.2 cw(c831.8,968.2) R2.2@831.8,970 cw(c835.2,973.4) 830.39,973.4 CN1.2@830.39,1043.9 ; R11.1@1265,1068.2 cw(c1261.8,1068.2) 1261.8,1065 cw(c1223.46,1026.66) 1277.68,1026.66 U4.32@1277.68,997.64 1277.68,968.1 U4.33@1346.57,899.21 U4.33@1346.81,898.97 ; C22.1@1395,695.8 1394.2,695 1385,695 1374,706 1374,761.06 1376.1,763.16 U4.14@1376.1,800.79 1376.1,828.26 ccw(c1276.1,828.26) U4.33@1346.81,898.97 ; U4.16@1415.47,800.79 1415.47,830.31 U4.33@1346.81,898.97 ; LED1.2@1432.05,435.33 1480,435.33 v2(1480,435)
  Bottom Layer w10: v2(615,640) cw(c615,625) 630,625 630,610 ; 680,675 640.61,635.61 ccw(c666.21,610) 630,610 ; 680,675 cw(c710.64,644.36) 710.64,687.69 C13.2@738.76,687.69 ; C17.1@741.75,552.52 cw(c737.32,552.52) 740.46,549.4 C16.1@705.76,514.69 700.36,509.29 cw(c690,519.64) 690,505 cw(c690,565.36) 647.32,522.68 635.61,534.39 cw(c661.21,560) 625,560 cw(c658.64,560) 634.85,583.79 C12.2@637.18,586.11 cw(c654.5,603.43) 630,603.43 630,610 ; U5.8@847.97,568.75 ccw(c917.38,638.16) 917.38,540 v2(1185,540)
DRV8323_CAL: R12.1 U2.31 U4.9 | length 699.5
  Top Layer w10: 805,805 824,824 v2(825,824) ; 805,805 ccw(c818.45,791.66) 802.84,780.94 U2.31@809.01,774.76 ; R12.1@1190,718.2 1190,767.9 cw(c1220.38,767.9) 1198.9,789.38 cw(c1224.54,763.74) 1224.54,800 v2(1235,800) 1235,782.07 ccw(c1252.07,782.07) 1240,770 ccw(c1252.07,782.07) 1252.07,765 1262.93,765 ccw(c1262.93,782.07) 1275,770 ccw(c1268.55,776.45) 1277.67,776.45 U4.9@1277.67,800.79
  Bottom Layer w8: v2(825,824) ccw(c849,824) 849,800 v2(1235,800)
DRV8323_EN: U2.30 U4.10 | length 557.3
  Top Layer w10: U2.30@847.99,774.76 v2(895,821.77) ; v2(1294.09,760.43) 1296.85,790.04 U4.10@1297.36,800.79
  Bottom Layer w8: v2(895,821.77) 1268.23,821.77 cw(c1268.23,795) 1295,795 1295,761.34 cw(c1294.09,761.34) v2(1294.09,760.43)
DRV8323_HA: U2.34 U4.18 | length 1009.5
  Top Layer w10: v2(730,790) 731.91,788.09 731.91,768.79 742,758.7 742,758.26 U2.34@767.26,733.01 ; U4.18@1445,850 1497.93,850 cw(c1497.93,832.93) v2(1510,845)
  Bottom Layer w8: v2(730,790) 730,855 cw(c755,855) 755,880 1010,880 cw(c1010,843.79) 1035.61,869.39 1050,855 ccw(c1074.14,879.14) 1074.14,845 v2(1510,845)
DRV8323_HB: U2.36 U4.19 | length 1064.9
  Top Layer w10: v2(700.55,813.19) 700,812.63 700,740.3 721.3,719 725.48,719 739.31,705.17 U2.36@739.42,705.17 ; U4.19@1445,869.69 1482.18,869.69 ccw(c1482.18,887.82) v2@1495,875
  Bottom Layer w8: v2(700.55,813.19) 700,813.19 700,870 cw(c725,870) 725,895 1017.28,895 cw(c1017.28,852.22) 1047.53,882.47 1060,870 ccw(c1084.14,894.14) 1084.14,860 1480,860 ccw(c1480,875) v2(1495,875)
DRV8323_HC: U2.38 U4.20 | length 1174.7
  Top Layer w10: v2(671,700) 673.71,700 681.91,691.8 697,691.8 711.47,677.33 U2.38@711.58,677.33 ; U4.20@1445,889.37 1466.41,889.37 ccw(c1466.41,908.59) 1480,895 ; 1480,895 cw(c1504.14,870.86) 1504.14,905 v2(1510,905)
  Bottom Layer w8: v2(671,700) 671,891 cw(c690,891) 690,910 1021.72,910 cw(c1021.72,841.72) 1070,890 ccw(c1094.14,914.14) 1094.14,880 1438.79,880
  Bottom Layer w10: 1438.79,880 ccw(c1438.79,931.21) 1475,895 ; 1475,895 cw(c1499.14,870.86) 1499.14,905 v2(1510,905)
DRV8323_LA: U2.35 U4.12 | length 737.4
  Top Layer w10: v2(721,750) 722.31,750 753.23,719.08 U2.35@753.34,719.08 ; v2@1320,720 ccw(c1279.61,760.39) 1336.73,760.39 U4.12@1336.73,800.79
  Bottom Layer w10: v2(721,750) 1235.86,750 cw(c1235.86,715.86) 1260,740 ccw(c1308.28,788.28) 1308.28,720 v2(1320,720)
DRV8323_LB: U2.37 U4.13 | length 799.2
  Top Layer w10: v2(697.8,712.8) 699.72,710.89 705.74,710.89 725.39,691.24 U2.37@725.5,691.24 ; v2(1301,695) 1320.86,695 ccw(c1320.86,729.14) 1345,705 ccw(c1317.45,732.55) 1356.41,732.55 U4.13@1356.41,800.79
  Bottom Layer w10: v2@699.6,714.6 v2(697.8,712.8) cw(c727.25,683.35) 727.25,725 856.72,725 cw(c856.72,656.72) 905,705 ccw(c929.14,729.14) 929.14,695 v2(1301,695)
DRV8323_LC: U2.39 U4.2 | length 919.4
  Top Layer w10: v2(650,675) 651,674 686.95,674 697.55,663.41 U2.39@697.66,663.41 ; v2(1210,950) ccw(c1213.79,953.79) 1213.79,948.43 U4.2@1248.15,948.43
  Bottom Layer w8: v2(650,675) 650,915 cw(c670,915) 670,935 900.86,935 ccw(c900.86,969.14) 925,945 ; 925,945 cw(c961.21,908.79) 961.21,960 988.79,960 cw(c988.79,908.79) 1025,945 ; 1025,945 ccw(c1049.14,969.14) 1049.14,935 1158.63,935 ccw(c1158.63,960.13) 1176.39,942.36 ccw(c1165,960) 1178.01,943.51 1178.64,944.01 cw(c1191.65,927.53) 1190.04,948.47 v2(1210,950)
DRV8323_nF: R7.2 U2.25 U4.11 | length 463
  Top Layer w8: U2.25@917.59,705.17 918.07,705.17 933.03,720.12 v2(933.52,720.12)
  Top Layer w10: v2(1220,720) 1256.65,720 1256.72,720 ccw(c1256.72,788.28) 1305,740 ccw(c1275.93,769.07) 1317.04,769.07 U4.11@1317.04,800.79
  Bottom Layer w8: v2(933.52,720.12) v2@933.58,720.06
  Bottom Layer w10: v2@933.58,720.06 1219.94,720.06 v2(1220,720)
DRV8323_SOA: U2.23 U4.5 | length 386.3
  Top Layer w10: U2.23@945.43,677.33 1128.19,860.09 cw(c1198.9,789.38) 1198.9,889.38 U4.5@1248.15,889.38
DRV8323_SOB: U2.22 U4.6 | length 369.9
  Top Layer w10: U2.22@959.35,663.41 1136.34,840.4 cw(c1207.05,769.69) 1207.05,869.69 U4.6@1248.15,869.69
DRV8323_SOC: U2.21 U4.7 | length 353.6
  Top Layer w10: U2.21@973.27,649.49 1144.5,820.72 cw(c1215.21,750.01) 1215.21,850.01 U4.7@1248.15,850.01
DVDD: C5.2 C7.2 R7.1 U2.24 U2.27 U2.29 U2.33 | length 1037
  Top Layer w6: U2.27@889.75,733.01 896.7,739.96 ccw(c876.65,760) 905,760 905,762.93 ccw(c887.93,762.93) v2(900,775) 882.24,775 ccw(c882.24,760.09) 871.7,770.63 897.68,796.61 cw(c930,764.29) 930,810 cw(c930,785.86) 947.07,802.93 976.46,773.54 cw(c967.93,765) 980,765 cw(c955.86,765) 972.93,747.93 C7.2@970,745 cw(c933.15,745) 959.21,718.94 U2.24@931.51,691.24
  Top Layer w10: 755,785 ccw(c783.74,785) 763.42,764.68 U2.33@781.18,746.92 ; C5.2@755,797.93 cw(c772.07,797.93) C5.2@760,810 ; 755,785 C5.2@755,797.93 ; v2@1245,640 1260.56,655.56 1260.56,665 R7.1@1265.56,670
  Sign w10: v2(900,775) 1176.72,775 cw(c1176.72,706.72) 1225,755 cw(c1176.72,706.72) 1245,706.72 v2(1245,640)
  Bottom Layer w10: v2(767.47,817.31) 767.47,810.25 ccw(c810.25,810.25) 780,780 ccw(c792.07,792.07) 792.07,775 v2(900,775)
ENCODER_CLK: U4.26 U5.12 | length 1258.2
  Top Layer w10: U4.26@1395.79,997.64 1395.79,1024.84 cw(c1410.16,1024.84) v2@1400,1035
  Sign w10: v2@1400,1035 cw(c1394.83,1029.83) 1402.14,1029.83 v2(1402.14,520)
  Bottom Layer w10: U5.12@767.24,610.51 764.39,607.67 ccw(c787.05,585) 755,585 ccw(c779.14,585) 762.07,567.93 780.71,549.29 ccw(c851.42,620) 851.42,520 1177.19,520 cw(c1177.19,510) 1179.7,519.68 ccw(c1185,540) 1190.31,519.68 cw(c1192.81,510) 1192.81,520 1272.19,520 ccw(c1272.19,530) 1274.7,520.32 cw(c1280,500) 1285.31,520.32 ccw(c1287.81,530) 1287.81,520 v2(1402.14,520)
  other v2: 1400,1035
ENCODER_CS: U4.25 U5.5 | length 1019
  Top Layer w10: U4.25@1415.47,997.64 1415.98,1008.39 v2(1426,1035)
  Sign w10: v2(1425,595) 1425.5,595.5 1425.5,1034.5 v2(1426,1035)
  Bottom Layer w10: U5.5@889.74,610.51 ccw(c927.18,647.96) 927.18,595 v2(1425,595)
ENCODER_MISO: U4.27 U5.7 | length 1036.2
  Top Layer w10: v2(1374.5,1040.1) 1375.59,1039.02 1375.59,998.15 U4.27@1376.1,997.64
  Sign w10: v2(1374.5,1040.1) 1374.5,675.57 cw(c1364.5,675.57) 1374.34,673.79 ccw(c1395,670) 1374.34,666.22 cw(c1364.5,664.43) 1374.5,664.43 1374.5,566.2 ccw(c1376.2,566.2) v2@1375,565
  Bottom Layer w10: U5.7@861.89,582.67 ccw(c904.56,625.34) 904.56,565 v2(1375,565)
ENCODER_MOSI: U4.28 U5.4 | length 867.2
  Top Layer w10: v2@1345,1035 cw(c1317.43,1007.43) 1356.42,1007.43 U4.28@1356.42,997.64
  Sign w10: v2(1345,670) v2(1345,1035)
  Bottom Layer w10: U5.4@889.74,649.49 cw(c939.26,599.97) 939.26,670 1180.3,670 1181.3,671 1198.7,671 1199.7,670 1257.19,670 ccw(c1257.19,680) 1259.7,670.32 cw(c1265,650) 1270.31,670.32 ccw(c1272.81,680) 1272.81,670 v2(1345,670)
FDCAN_RX: U1.4 U4.21 | length 1280.8
  Top Layer w8: v2(475,1085) 490,1100 ; 490,1100 cw(c502.07,1087.93) 502.07,1105 505,1105 cw(c505,1092.93) 513.54,1101.46 516.46,1098.54 cw(c507.93,1090) 520,1090 cw(c494.13,1090) 512.42,1071.71 U1.4@511.83,1071.12 ; U4.21@1445,909.06 1449.45,909.06 ccw(c1449.45,980.55) 1500,930 ; 1500,930 1502.93,932.93 cw(c1520,915.86) v2(1520,940)
  Sign w8: v2(475,1085) 570.71,989.29 ccw(c641.42,1060) 641.42,960 814.03,960 ccw(c814.03,968) 818.58,961.42 cw(c830,945) 841.41,961.42 ccw(c845.97,968) 845.97,960 v2(1165,960)
  Bottom Layer w8: v2@1165,960 cw(c1201.21,923.79) 1201.21,975 1205,975 cw(c1205,902.57) 1256.21,953.79 1270,940 ccw(c1294.14,964.14) 1294.14,930 1495.86,930 ccw(c1495.86,964.14) v2(1520,940)
FDCAN_TX: U1.1 U4.22 | length 1079.6
  Top Layer w8: U1.1@566.12,1016.83 566.12,1019.53 573.23,1026.64 v2(573.23,1029.35) ; U4.22@1445,928.74 ccw(c1445,998.12) 1494.06,949.06 v2(1520,975)
  Sign w8: v2(573.23,1029.35) 573.29,1029.29 ccw(c644,1100) 644,1000 v2(1205,1000)
  Bottom Layer w8: v2(1205,1000) 1216.86,1000 cw(c1216.86,900) 1287.57,970.71 1294.14,964.14 ccw(c1316.21,986.21) 1316.21,955 1471.72,955 ccw(c1471.72,1023.28) v2(1520,975)
NetC3_1: C3.1 U2.3 | length 77.3
  Top Layer w10: C3.1@650,540 ccw(c650,585.65) 682.28,553.37 U2.3@711.58,582.67
NetC4_1: C4.1 U2.1 | length 99.5
  Top Layer w10: C4.1@585.92,604.08 cw(c588.13,601.87) 588.13,605 670.42,605 ccw(c670.42,623.84) U2.1@683.74,610.52
NetC4_2: C4.2 U2.2 | length 84.8
  Top Layer w10: C4.2@620,570 cw(c657.79,532.21) 657.79,585.65 671.25,585.65 ccw(c671.25,623.01) 676.81,586.07 679.11,586.42 ccw(c677.47,597.29) 680.99,586.87 683.2,587.62 ccw(c671.25,623.01) U2.2@697.66,596.59
NetC10_1: C10.1 U6.4 | length 76.3
  Top Layer w10: U6.4@380.55,645.59 400,646.5 400,694.3 C10.1@395,701.8
NetC10_2: C10.2 L1.1 U6.6 | length 73.8
  Top Layer w10: L1.1@335.48,725 cw(c360.48,725) 360.48,750 C10.2@395,750
NetC21_2: C21.2 U6.2 | length 177.5
  Top Layer w10: U6.2@380.55,594.41 414.43,594.41 ccw(c414.43,630.57) 440,605 ccw(c425.51,619.49) 446,619.49 446,685.88 cw(c456,685.84) 446.87,689.91 cw(c466.24,681.2) 451.22,696.22 cw(c470,677.44) C21.2@470,704